# Altium PCB hackster1.PcbDoc
Units mm, origin at the board's own origin, x right, y up, seen from the top; angles counter-clockwise.
Board outline 72.59 x 67.63 mm, 2 copper layers (Top Layer, Bottom Layer); 10 components, 8 nets, 29 pads, 0 vias.
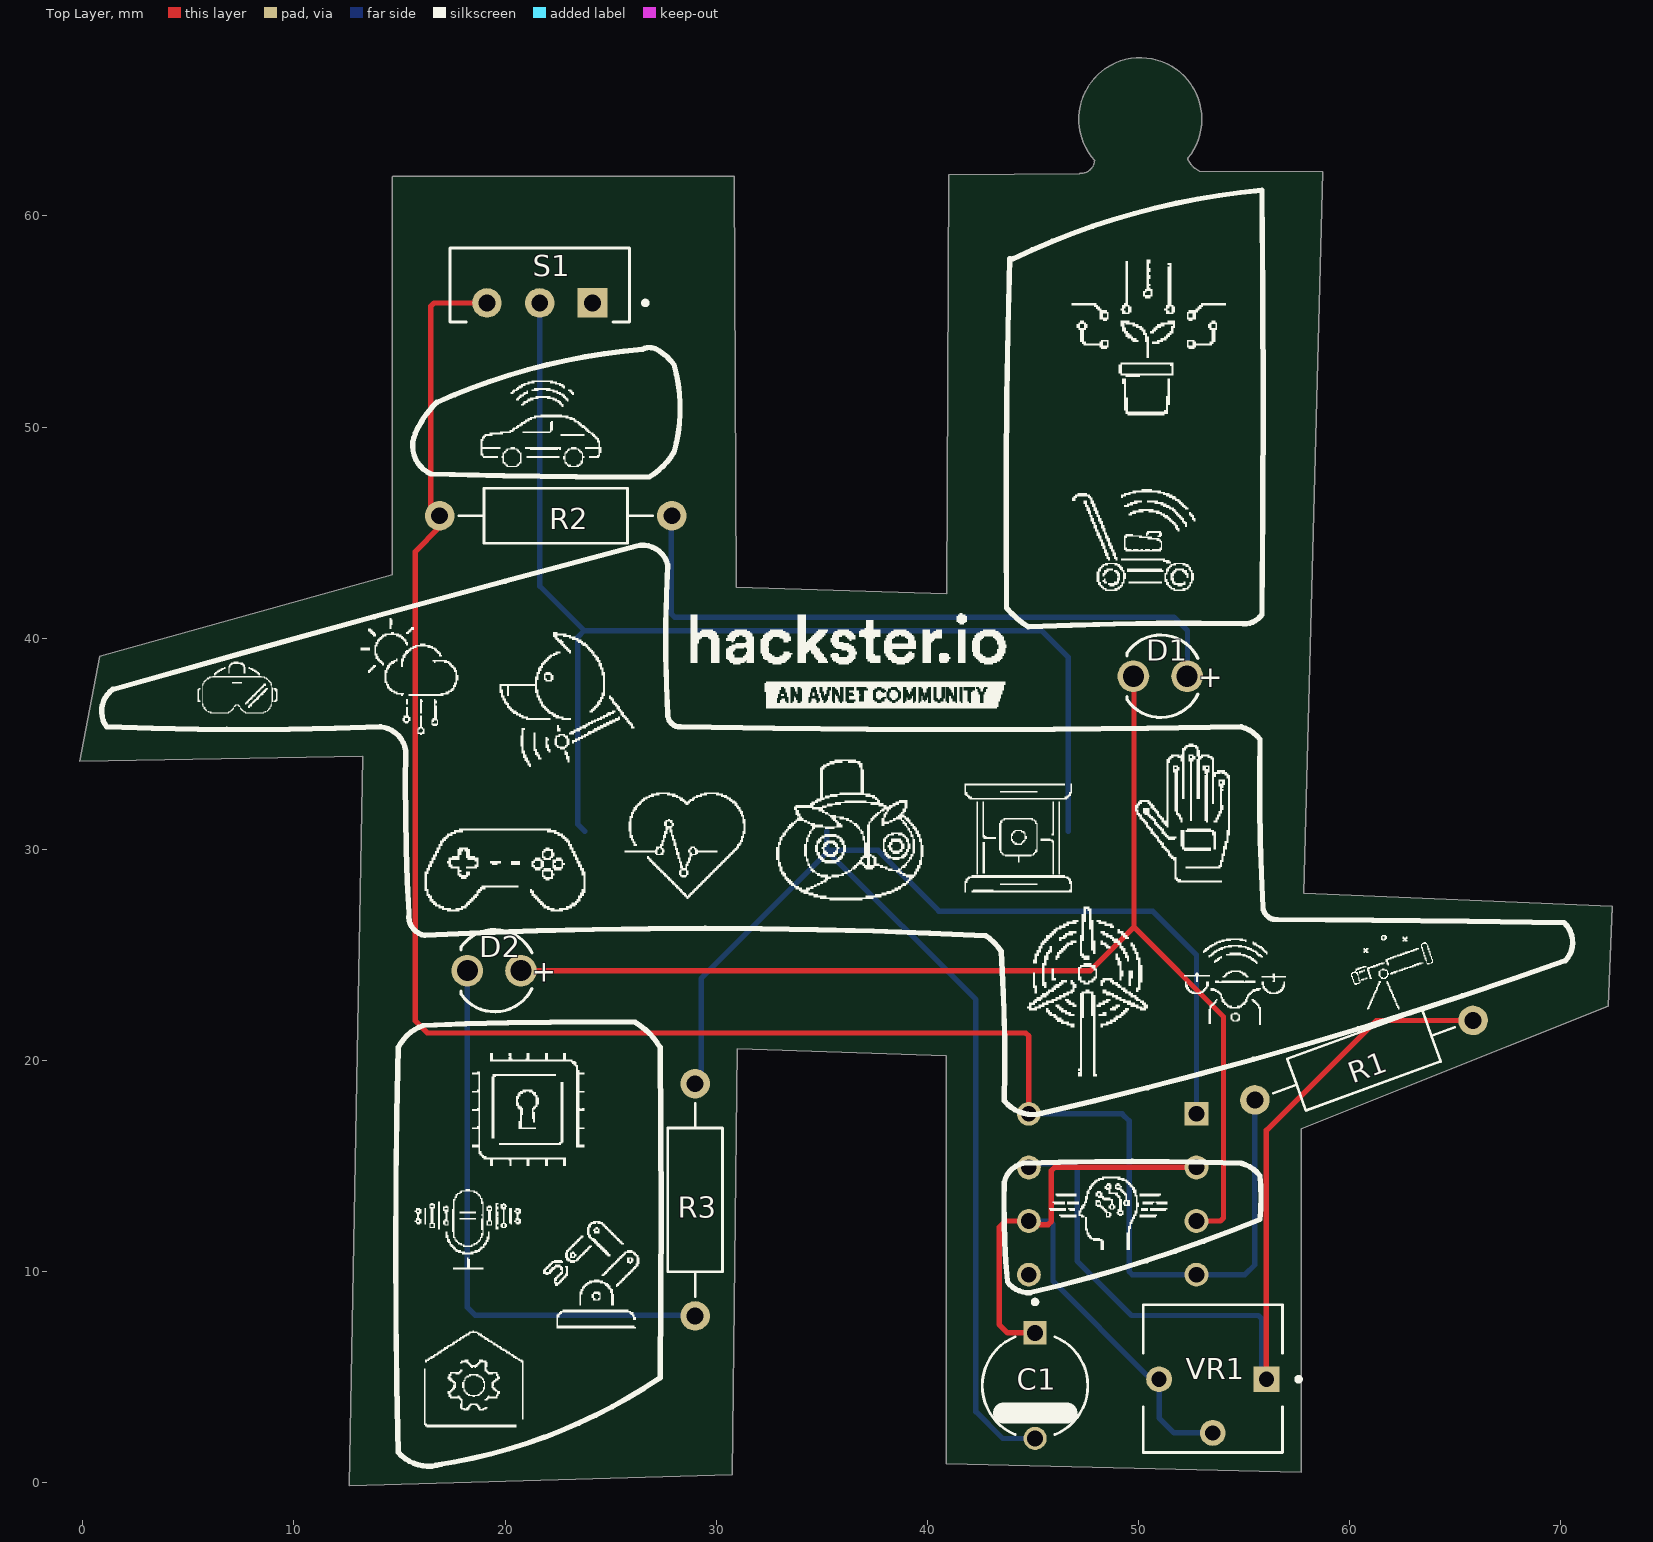
[diagram p0: Top Layer view]
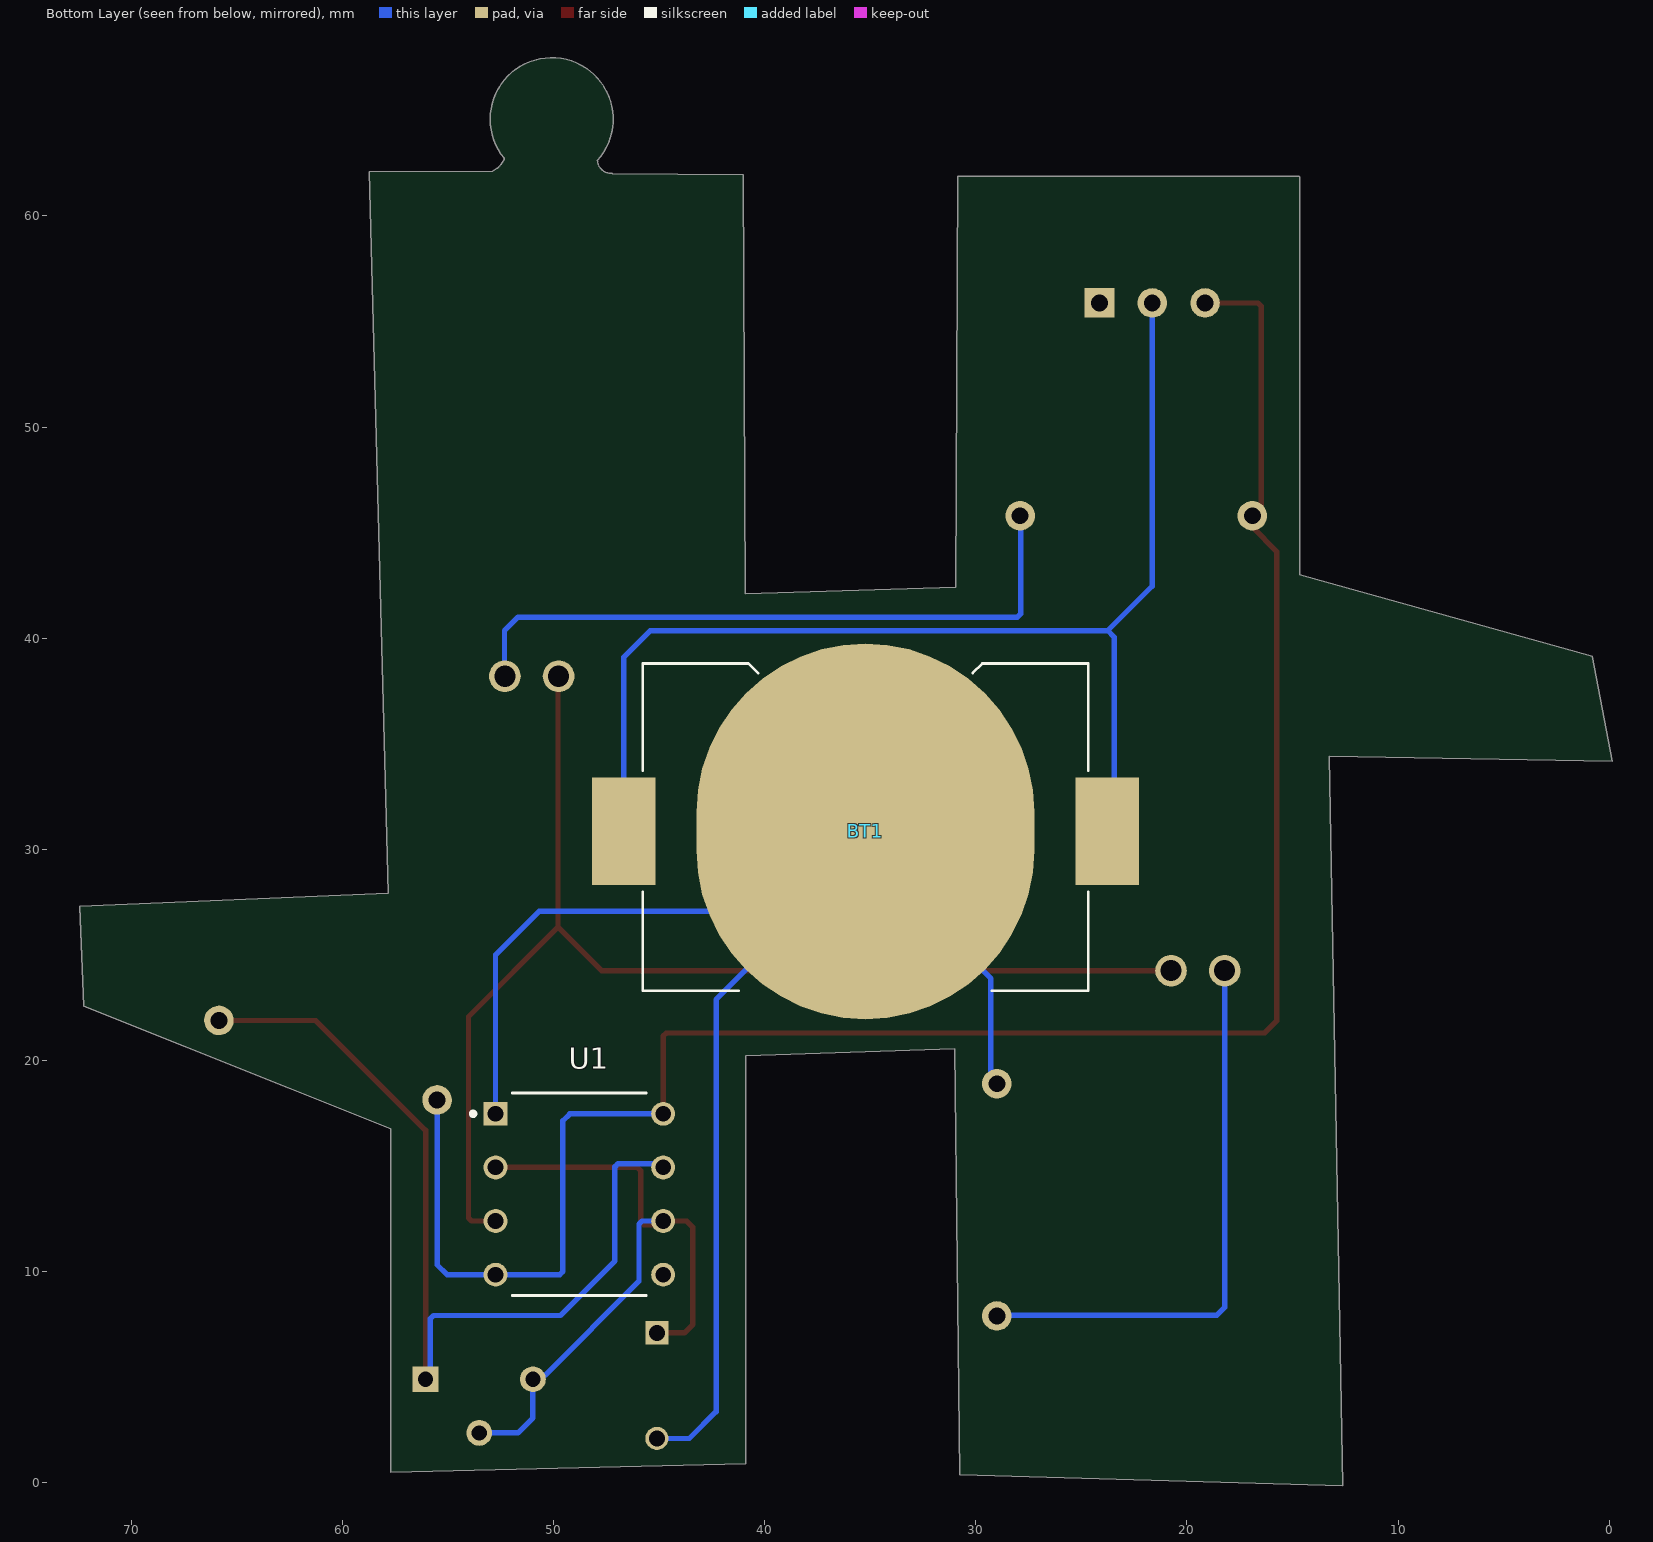
[diagram p1: Bottom Layer view, seen from below]
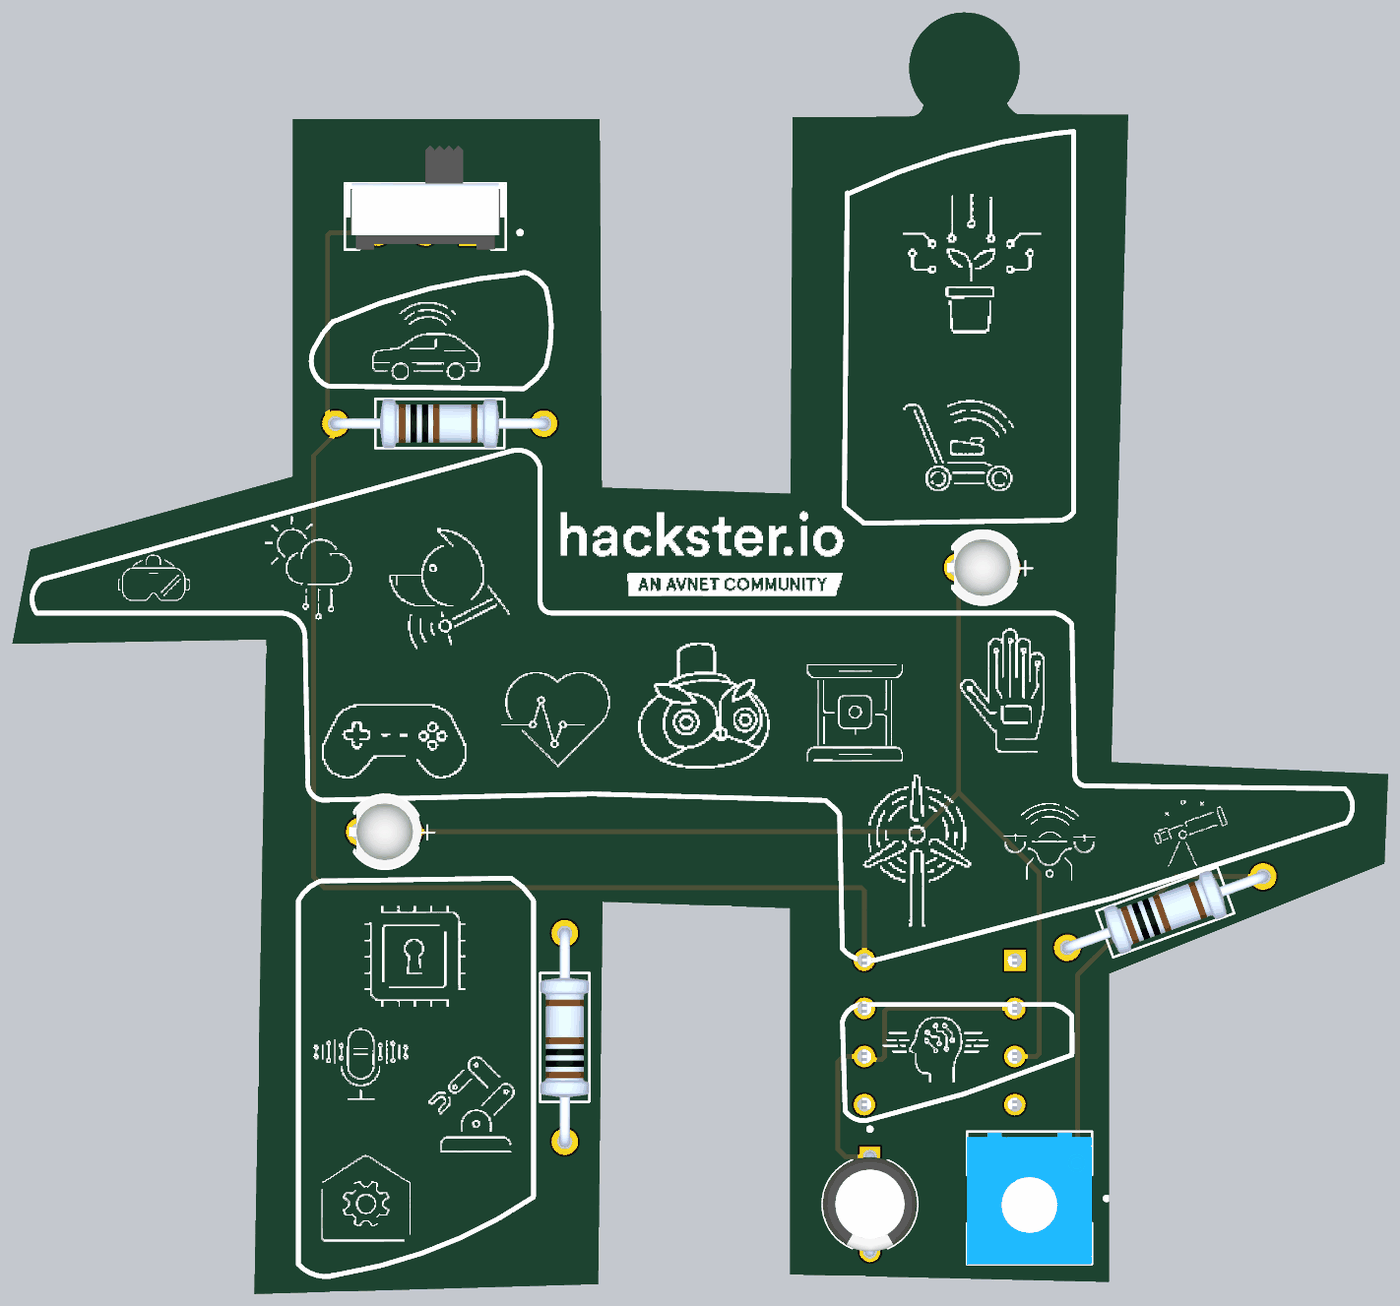
[diagram p2: 3D render of the assembled board from above, using the file's embedded part models]

## Layer stack, top to bottom
Top Solder: solder mask 0.0102, Solder Resist, Dk 3.5
Top Layer: signal copper 0.0356
Dielectric 1: dielectric 0.32, FR-4, Dk 4.8
Bottom Layer: signal copper 0.0356
Bottom Solder: solder mask 0.0102, Solder Resist, Dk 3.5

## Board outline
12.623,-0.138 30.762,0.384 30.992,20.566 40.894,20.224 40.894,0.894 57.708,0.497 57.708,16.764 72.243,22.578 72.44,27.294 57.835,27.929 58.724,62.092 52.898,62.122 cw(c53.336,63.119) 52.339,62.681 52.34,62.731 ccw(c50.086,64.58) 47.922,62.626 cw(c47.262,62.677) 47.211,62.017 47.211,61.998 41.023,61.962 40.915,42.101 30.954,42.422 30.842,61.874 14.681,61.874 14.655,61.848 14.655,43.001 0.799,39.152 -0.147,34.173 13.258,34.406

## Design rules (kind name [scope] priority, off if disabled: settings)
Clearance [All] p1: gap=0.254 ignorepadtopadclearanceinfootprint=FALSE except(0: Arc-Hole Track-Hole SMDPad-Hole THPad-Hole Via-Hole Fill-Hole Poly-Hole Region-Hole Text-Hole)
PolygonConnect [All] p1: connectstyle=Relief reliefconductorwidth=0.254 reliefentries=4 polygonreliefangle="90 Angle" airgapwidth=0.254
RoutingVias [All] p1: holewidth=0.711 width=1.27 viastyle="Through Hole" minholewidth=0.711 minwidth=1.27 maxholewidth=0.711 maxwidth=1.27
SolderMaskExpansion [All] p1: expansion=0.102 istentingtop=FALSE
Width [All] p1: maxlimit=0.254 minlimit=0.254 preferedwidth=0.254
30 further rules are at their usual default settings.

## Components (designator, comment, footprint, x,y, rotation, side; value= is the part's Value field where it differs from the comment)
BT1 "BAT-HLD-001" BAT_BAT-HLD-001 35.229,30.85 r0 bottom
C1 "ECA1CHG100B" CAPPRD500W50D500H1100 45.1,4.6 r270 top
D1 "Blue, 2.8V, 30°" WL-TMRW_D3.9H10.5 51.03,38.2 r180 top
D2 "Blue, 2.8V, 30°" WL-TMRW_D3.9H10.5 19.482,24.257 r180 top
R1 "1K" RESAD1100W55L680D260 60.681,20.015 r20 top
R2 "220" RESAD1100W55L680D260 22.4,45.8 r0 top
R3 "220" RESAD1100W55L680D260 29,13.4 r90 top
S1 "EG1270" SW_EG1270 21.641,55.88 r180 top
U1 "LMC555CN/NOPB" DIP794W45P254L959H508Q8 48.776,13.665 r180 bottom
VR1 "3362P-1-104LF" TRIM_3362P-1-104LF 53.518,4.902 r180 top

## Footprints (in the part's own frame and the unit in brackets; to place one, negate y for a bottom-side part, rotate by r counter-clockwise, add the part's x,y. Pads: shape width x height; smd on the part's side, far side on the other; paste and mask are expansions set on the pad)
BAT_BAT-HLD-001 [mm]
  oval 16x17.8 smd paste-10: N1(0,0)
  rect 3x5.1 smd: P1(-11.45,0) P2(11.45,0)
  silkscreen extent -10.55,-7.95 10.55,7.55, body extent -11.43,-7.75 11.43,7.75, height 4.32
CAPPRD500W50D500H1100 [mm]
  round 1.1 hole 0.75: N(2.5,0)
  rect 1.1x1.1 / inner round 1.1 / far side rect 1.1x1.1 hole 0.75: P(-2.5,0)
  silkscreen extent -4.06,-2.5 2.32,2.5, body extent -2.75,-2.5 2.75,2.5, height 12.5
DIP794W45P254L959H508Q8 [mm]
  rect 1.13x1.13 / inner round 1.13 / far side rect 1.13x1.13 hole 0.74: 1(-3.97,3.81)
  round 1.13 hole 0.74: 2(-3.97,1.27) 3(-3.97,-1.27) 4(-3.97,-3.81) 5(3.97,-3.81) 6(3.97,-1.27) 7(3.97,1.27) 8(3.97,3.81)
  silkscreen extent -5.13,-4.79 3.18,4.79, body extent -4.1,-4.8 4.1,4.79, height 5.08
RESAD1100W55L680D260 [mm] "Chip Resistor, Body 3.2x1.6mm, IPC High Density"
  round 1.4 hole 0.8: 1(-5.5,0) 2(5.5,0)
  silkscreen extent -4.58,-1.3 4.58,1.3, body extent -5.77,-1.29 5.77,1.29, height 2.6
SW_EG1270 [mm]
  rect 1.4x1.4 hole 0.8: 1(-2.5,0)
  round 1.4 hole 0.8: 2(0,0) 3(2.5,0)
  silkscreen extent -5.1,-2.6 4.25,0.9, body extent -4.25,-4.6 4.25,0.9, height 5.1
TRIM_3362P-1-104LF [mm]
  rect 1.222x1.222 / inner round 1.222 / far side rect 1.222x1.222 hole 0.714: 1(-2.54,0)
  round 1.222 hole 0.714: 2(0,2.54) 3(2.54,0)
  silkscreen extent -4.16,-3.53 3.3,3.47, body extent -3.3,-3.49 3.3,3.49, height 4.88
WL-TMRW_D3.9H10.5 [mm] "THT Mono-color Round LED, 2-leads"
  round 1.5 hole 1: 1(1.27,0) 2(-1.27,0)
  silkscreen extent -1.79,-1.95 1.57,1.95, body extent -1.97,-1.95 1.85,1.95, height 10.55

## Part data
BT1: "Battery Retainer Coin, 20.0mm 1 Cell SMD (SMT) Tab", Package=None, Availability=Unavailable, MP=BAT-HLD-001, Price=None
C1: "Cap Aluminum Lytic 10uF 16V 20% (5 X 11mm) Radial 5mm 31mA 1000h 105C Automotive Ammo", Package="RADIAL-2 Panasonic", Check_prices=https://www.snapeda.com/parts/ECA-1CHG100B/Panasonic/view-part/?ref=eda, MF="Panasonic Electronic", MP=ECA-1CHG100B, SnapEDA_Link=https://www.snapeda.com/parts/ECA-1CHG100B/Panasonic/view-part/?ref=snap
D1 D2: library part 151033BS03000, "WL-TMRW Mono-color Round Waterclear, THT, D3.9 x H10.5mm, Blue, 2.8V, 30°", Emitting Color=Blue, Forward Voltage=2.8V, Manufacturer="Wurth Elektronik", Operating Temperature Max=85°C, Operating Temperature Min=-40°C, Category="Signal LEDs", Chip Technology=InGaN, ComponentLink1Description="Website Link", ComponentLink1URL=https://www.we-online.com/redexpert/article/151033BS03000?ad, ComponentLink2Description="Datasheet Link", ComponentLink2URL=https://www.we-online.com/redexpert/spec/151033BS03000?ad, Diameter=3.9mm, Dominant Wavelength=470nm, Height=10.5mm, Luminous Intensity=3800mcd, Manufacturer Part Number=151033BS03000, Match Code=WL-TMRW, Mount="Through Hole", Packaging=Bulk, Peak Wavelength=465nm, Viewing Angle=30°
R1 R2 R3: library part Res, "Resistor"
S1: "Slide Switch SPDT Through Hole, Right Angle", Package=None, Availability="In Stock", Check_prices=https://www.snapeda.com/parts/EG1270/E-Switch/view-part/?ref=eda, MF=E-Switch, MP=EG1270, Price=None, Purchase-URL=https://pricing.snapeda.com/search/part/EG1270/?ref=eda, SnapEDA_Link=https://www.snapeda.com/parts/EG1270/E-Switch/view-part/?ref=snap
U1: "Worldâ€™s smallest 555 timer with low power, high accuracy and a Fmax of 3MHz", Package="PDIP-8 Texas", Check_prices=https://www.snapeda.com/parts/LMC555CN/NOPB/Texas+Instruments/view-part/?ref=eda, MF="Texas Instruments", MP=LMC555CN/NOPB, SnapEDA_Link=https://www.snapeda.com/parts/LMC555CN/NOPB/Texas+Instruments/view-part/?ref=snap
VR1: "Res Cermet Trimmer 100K Ohm 10% 0.5W(1/2W) 1(Elec)/1(Mech)Turns 2.77mm (6.6 X 6.99 X 4.7mm) Pin Thru-Hole Tube", Package="3362P-1 Bourns Inc.", Check_prices=https://www.snapeda.com/parts/3362P1104LF/Bourns/view-part/?ref=eda, MF="Bourns Electronics", MP=3362P1104LF, SnapEDA_Link=https://www.snapeda.com/parts/3362P1104LF/Bourns/view-part/?ref=snap

## Nets (pads, with @x,y where several pads share a name; then routed paths per layer and width w, separated by ;. In a path a pad name is that pad's centre, name@x,y a point inside that pad or via, vN(x,y) a via of type N, cw(c..) or ccw(c..) an arc to the next point about the centre after c; other vN are vias at no path point)
GND: BT1.N1 C1.N R3.2 U1.1 | length 74.2
  Bottom Layer w0.254: R3.2@29.286,18.937 29.286,23.876 35.229,29.819 BT1.N1@35.229,29.95 ; BT1.N1 BT1.N1@35.229,29.95 ; BT1.N1@35.295,29.884 42.3,22.879 42.3,3.369 43.572,2.097 C1.N@45.1,2.097 ; U1.1 52.746,25.004 50.673,27.076 40.543,27.076 37.67,29.95 BT1.N1@35.229,29.95
NetBT1_P1: BT1.P1 BT1.P2 S1.2 | length 57.9
  Bottom Layer w0.254: S1.2 21.641,42.469 23.749,40.361 ; BT1.P1 23.444,31.185 23.444,40.056 23.749,40.361 ; BT1.P2 46.679,39.097 45.415,40.361 23.749,40.361
NetC1_P: C1.P U1.2 U1.6 VR1.2 VR1.3 | length 34.1
  Top Layer w0.254: C1.P 43.8,7.1 43.4,7.5 43.4,12.1 43.695,12.395 U1.6 44.973,12.228 45.724,12.228 45.872,12.376 45.872,14.783 46.025,14.935 U1.2
  Bottom Layer w0.254: U1.6 45.8,12.395 45.949,12.246 45.949,9.551 50.413,5.087 50.793,5.087 VR1.3 50.978,3.073 51.689,2.362 VR1.2
NetD1_1: D1.1 D2.2 U1.3 | length 58.7
  Top Layer w0.254: D2.2 47.727,24.257 49.784,26.314 ; D1.1@49.784,38.2 49.784,26.314 ; U1.3 52.822,12.319 52.898,12.395 53.877,12.395 54.026,12.544 54.026,22.073 49.784,26.314
NetD1_2: D1.2 R2.2 | length 31
  Bottom Layer w0.254: R2.2@27.877,45.237 27.877,41.149 28.026,41 51.685,41 52.324,40.361 D1.2@52.324,38.2
NetD2_1: D2.1 R3.1 | length 27.2
  Bottom Layer w0.254: D2.1 18.212,8.306 18.581,7.937 R3.1@29.286,7.937
NetR1_1: R1.1 R2.1 S1.3 U1.4 U1.8 | length 96.3
  Top Layer w0.254: S1.3 16.633,55.88 16.485,55.731 16.485,45.94 16.877,45.548 16.877,45.237 15.748,44.108 15.748,21.869 16.317,21.3 44.657,21.3 44.806,21.151 U1.8
  Bottom Layer w0.254: U1.8 49.225,17.475 49.555,17.145 49.555,10.004 49.704,9.855 55.042,9.855 55.512,10.326 R1.1
NetR1_2: R1.2 U1.7 VR1.1 | length 43.4
  Top Layer w0.254: VR1.1 56.058,16.688 61.266,21.896 R1.2
  Bottom Layer w0.254: U1.7 44.973,15.103 45.382,15.103 45.392,15.113 46.943,15.113 47.092,14.964 47.092,10.508 49.675,7.925 55.68,7.925 55.829,7.776 55.829,5.131 VR1.1
pads on no net: S1.1 U1.5

## Silkscreen, mask and mechanical layers (free items; w line width, h text height)
Top Overlay:
  drawing of 296 lines, arcs and shapes, not listed
Board:
  circle w0.254: c50.14,64.655 r1.9
  lines w0.254: 47.211,61.998 41.023,61.962 40.915,42.101 30.954,42.422 30.842,61.874 14.681,61.874 14.655,61.848 14.655,61.617 14.655,43.001 0.799,39.152 -0.147,34.173 13.258,34.406 12.623,-0.138 30.762,0.384 30.992,20.555 40.894,20.214 40.894,0.894 57.708,0.497 57.708,16.764 72.243,22.578 72.44,27.294 57.835,27.929 58.724,62.092 52.898,62.122 cw(c53.336,63.119) 52.339,62.681 ; 47.211,62.017 ccw(c47.262,62.677) 47.922,62.626 cw(c50.086,64.58) 52.34,62.731

## Text inside footprints (layer, text, board x,y; h text height)
D1: Top Overlay "+" at 53.98,38.55 h1 r180
D2: Top Overlay "+" at 22.432,24.607 h1 r180